# Altium PCB DVT-Discrete.PcbDoc
Units mm, origin at the board's own origin, x right, y up, seen from the top; angles counter-clockwise.
Board outline 100 x 78 mm, 2 copper layers (Top Layer, Bottom Layer); 45 components, 38 nets, 166 pads, 3 vias.
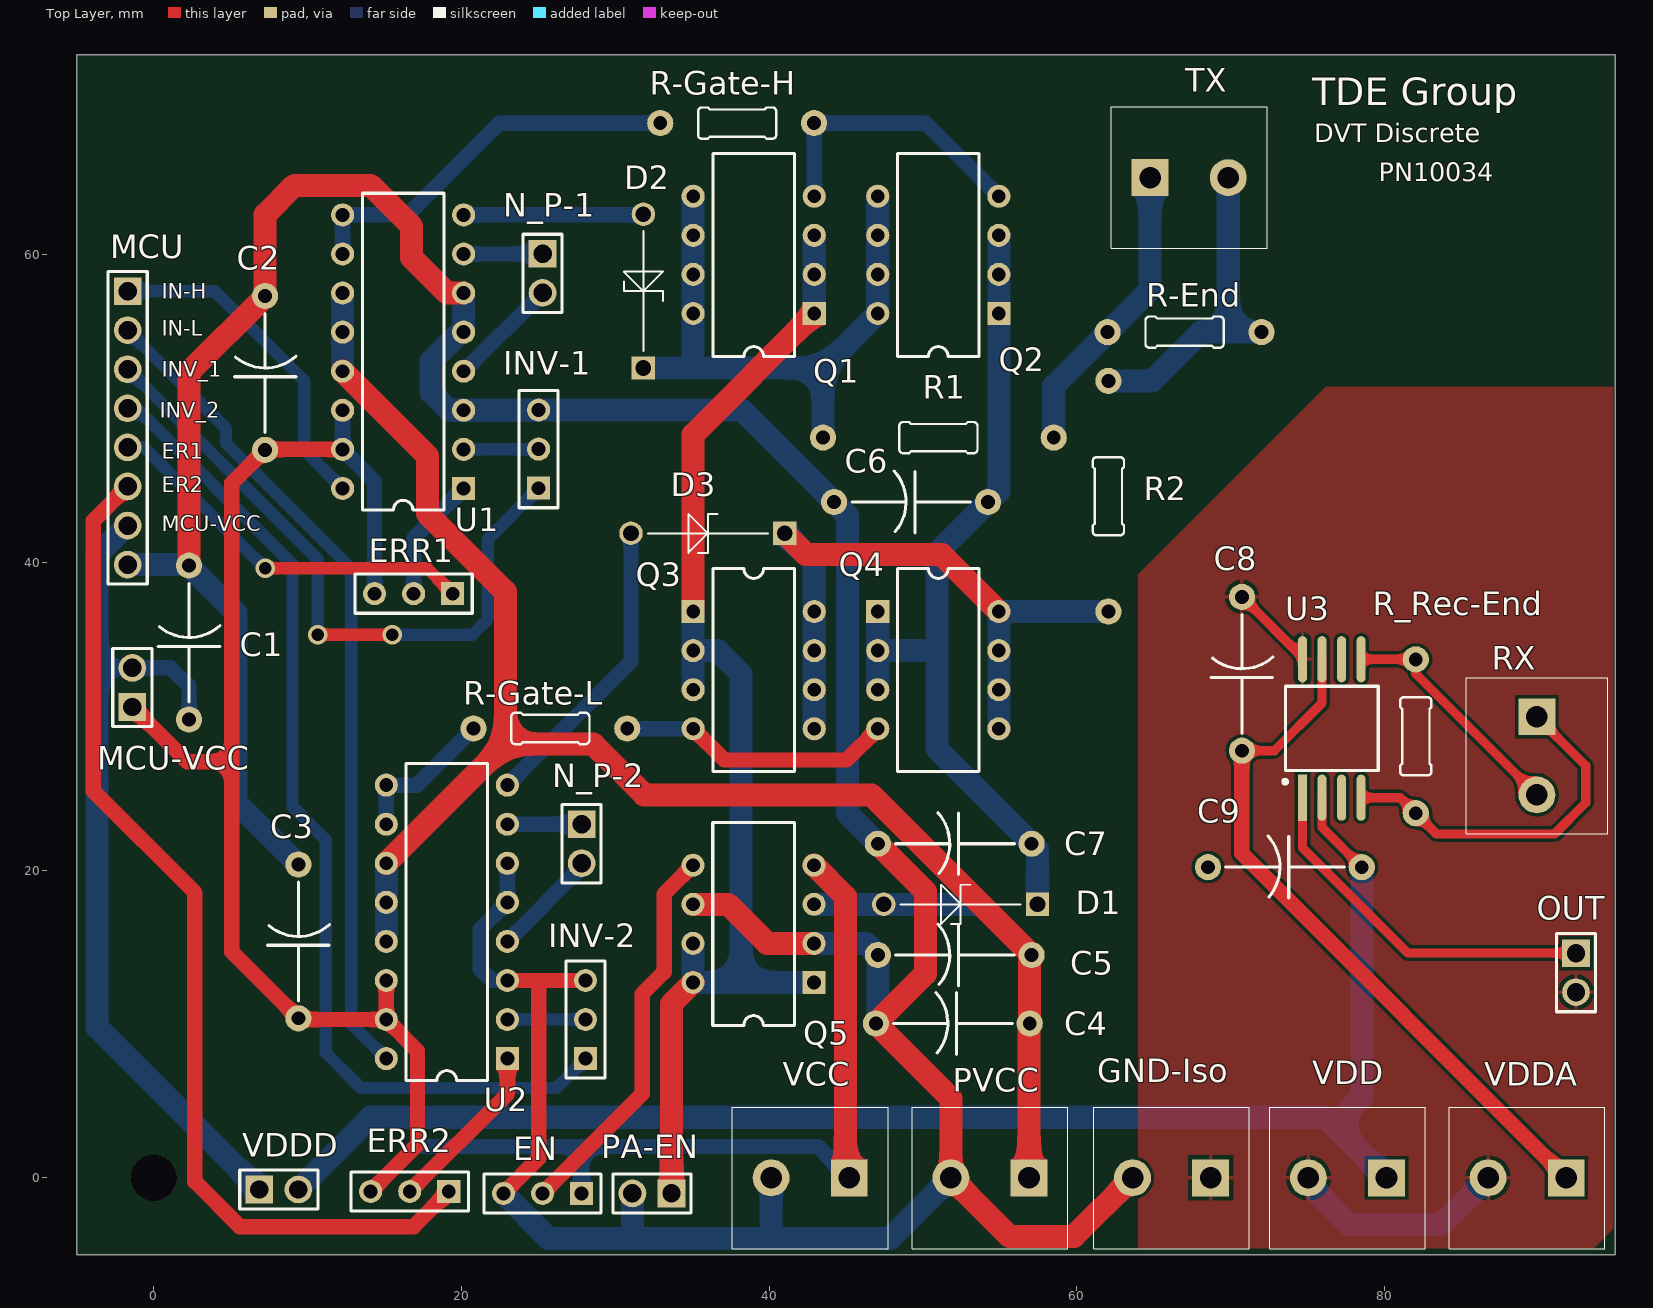
[diagram p0: Top Layer view]
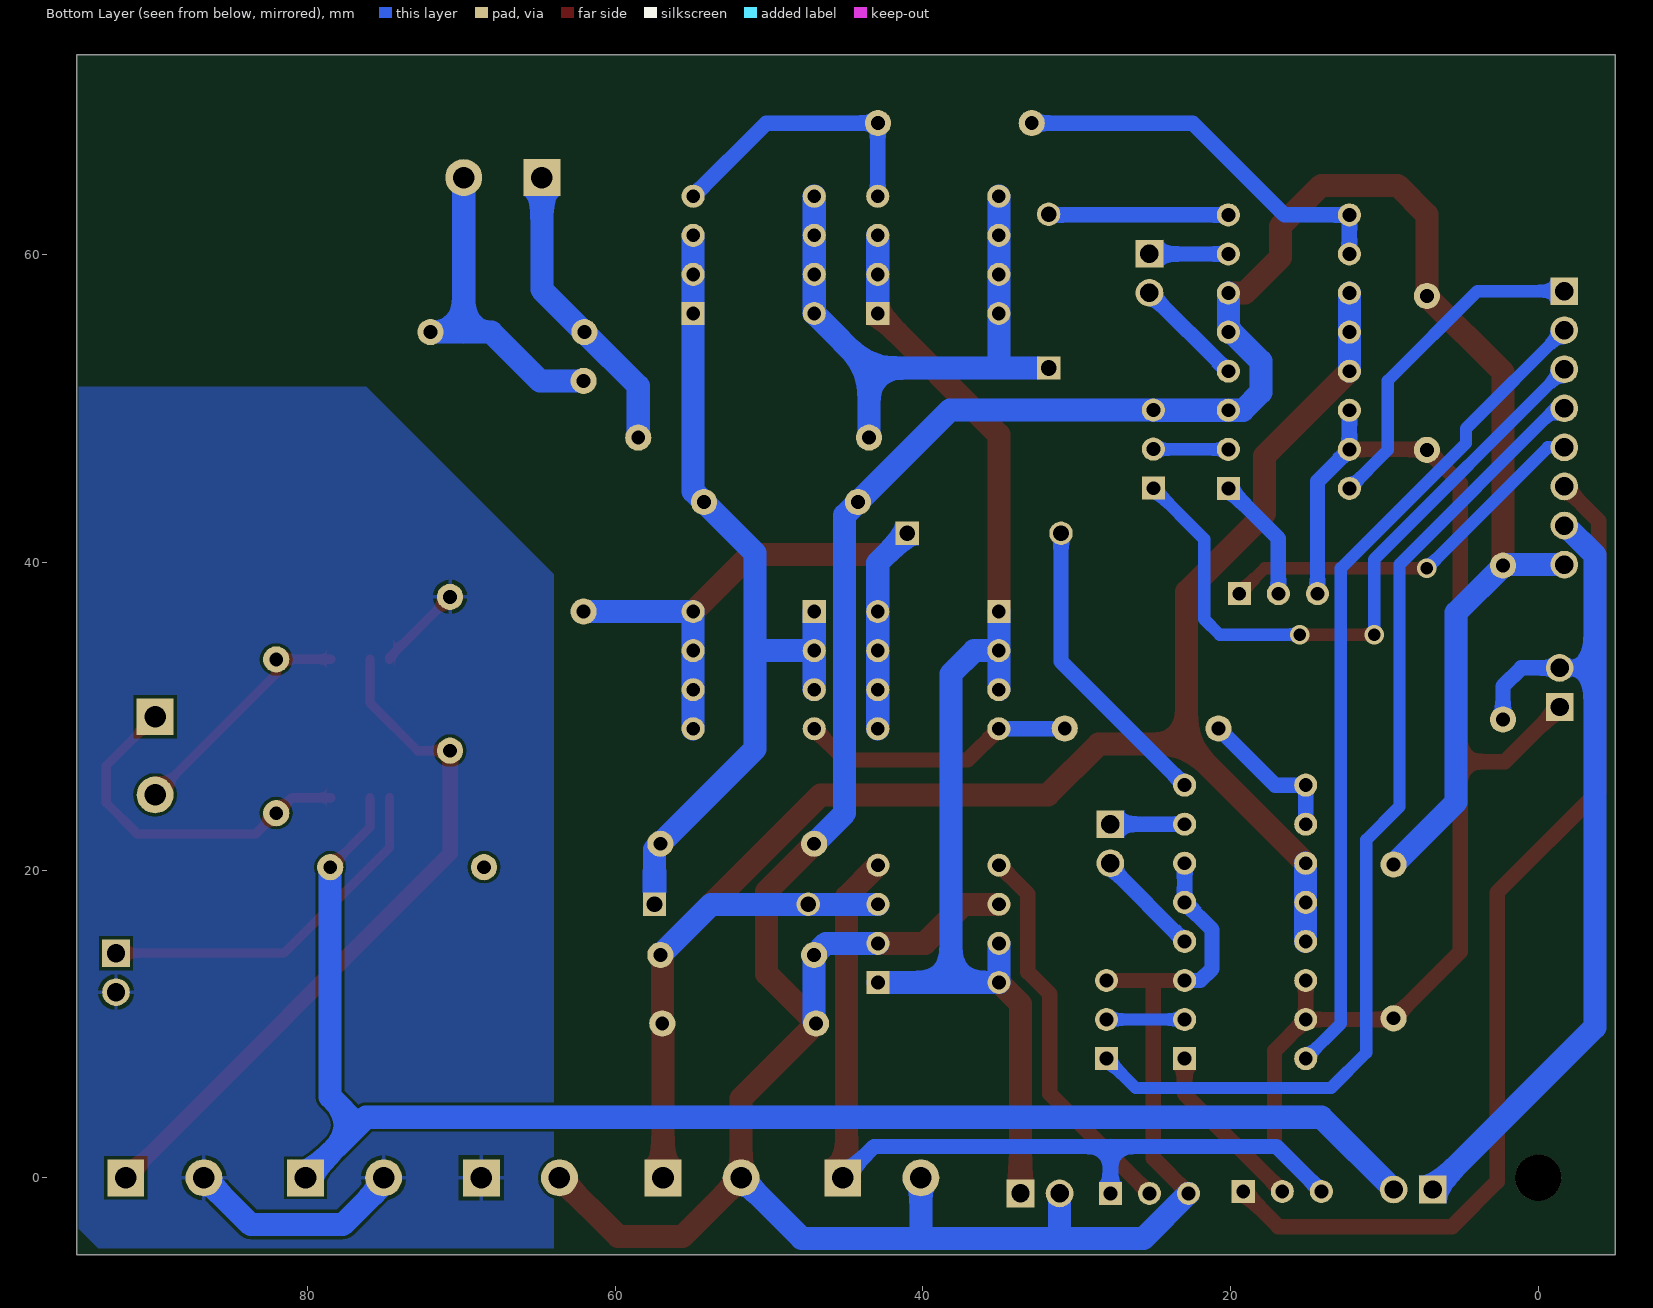
[diagram p1: Bottom Layer view, seen from below]

## Layer stack, top to bottom
Top Solder: solder mask 0.0102, Solder Resist, Dk 3.5
Top Layer: signal copper 0.0356
Dielectric 1: dielectric 0.32, FR-4, Dk 4.8
Bottom Layer: signal copper 0.0356
Bottom Solder: solder mask 0.0102, Solder Resist, Dk 3.5

## Board outline
-5,-5 -5,73 95,73 95,-5

## Design rules (kind name [scope] priority, off if disabled: settings)
Clearance [All] p1: gap=0.2
HoleSize [All] p1: absolutevalues=TRUE maxlimit=5 minlimit=0.025 maxpercent=80.000 minpercent=20.000
PolygonConnect [All] p1: connectstyle=Relief reliefconductorwidth=0.254 reliefentries=4 polygonreliefangle="90 Angle" airgapwidth=0.254
RoomDefinition DVT-Discrete-2 [InComponentClass('DVT-Discrete-2')] p1: confinementstyle=ConfineIn formatcopy=TRUE lockcomponents=FALSE outline -9.064,-13.096 102.108,-13.096 102.108,80.503 -9.064,80.503
RoomDefinition DVT-Discrete-1 [InComponentClass('DVT-Discrete-1')] p2: confinementstyle=ConfineIn formatcopy=TRUE lockcomponents=FALSE outline -7.286,-17.399 105.156,-17.399 105.156,78.867 -7.286,78.867
RoutingVias [All] p1: holewidth=0.711 width=1.27 viastyle="Through Hole" minholewidth=0.711 minwidth=1.27 maxholewidth=0.711 maxwidth=1.27
SilkToSolderMaskClearance [IsPad] p1: minsilkscreentomaskgap=0.1 clearancetoexposedcopper=TRUE
SolderMaskExpansion [All] p1: expansion=0.102
Width [All] p1: maxlimit=5 minlimit=0.254 preferedwidth=0.8
28 further rules are at their usual default settings.

## Classes and differential pairs
component class DVT-Discrete-1: C6 C7 D1 D2 D3 EN ERR1 ERR2 INV-1 INV-2 MCU N_P-1 N_P-2 PA-EN Q1 Q2 Q3 Q4 Q5 R1 R2 R-End R-Gate-H R-Gate-L TX U1 U2
component class DVT-Discrete-2: C1 C2 C3 C4 C5 C8 C9 GND-Iso MCU-VCC OUT PVCC R_Rec-End RX U3 VCC VDD VDDA VDDD

## Components (designator, comment, footprint, x,y, rotation, side; value= is the part's Value field where it differs from the comment)
C1 "Capacitor-Dummy-THT" Dummy-10mm 2.286,34.798 r90 top
C2 "Capacitor-Dummy-THT" Dummy-10mm 7.239,52.324 r90 top
C3 "Capacitor-Dummy-THT" Dummy-10mm 9.398,15.367 r90 top
C4 "Capacitor-Dummy-THT" Dummy-10mm 51.943,10.033 r180 top
C5 "Capacitor-Dummy-THT" Dummy-10mm 52.07,14.478 r180 top
C6 "Capacitor-Dummy-THT" Dummy-10mm 49.229,43.927 r180 top
C7 "Capacitor-Dummy-THT" Dummy-10mm 52.07,21.717 r180 top
C8 "Capacitor-Dummy-THT" Dummy-10mm 70.739,32.766 r90 top
C9 "Capacitor-Dummy-THT" Dummy-10mm 73.533,20.193 r180 top
D1 "Diode-Dummy" DO-15-Dummy 52.451,17.78 r0 top
D2 "Diode-Dummy" DO-15-Dummy 31.83,57.643 r270 top
D3 "Diode-Dummy" DO-15-Dummy 36.021,41.895 r0 top
EN "Plug_3_90_2.54" HDR1X3 25.273,-1.016 r180 top
ERR1 "Plug_3_90_2.54" HDR1X3 16.891,37.973 r180 top
ERR2 "Plug_3_90_2.54" HDR1X3 16.637,-0.889 r180 top
GND-Iso "PHOENIX_1715721" Phoenix-2-5_08 66.167,0 r180 top
INV-1 "Plug_3_90_2.54" HDR1X3 25.019,47.371 r90 top
INV-2 "Plug_3_90_2.54" HDR1X3 28.067,10.287 r90 top
MCU "Plug_08_2.54" HDR1X8_2.54 -1.698,48.753 r270 top
MCU-VCC "Plug_2_90_2.54" HDR1X2 -1.397,31.877 r90 top
N_P-1 "Plug_2_90_2.54" HDR1X2 25.273,58.801 r270 top
N_P-2 "Plug_2_90_2.54" HDR1X2 27.813,21.717 r270 top
OUT "Plug_2_90_2.54" HDR1X2 92.456,13.335 r270 top
PA-EN "Plug_2_90_2.54" HDR1X2 32.385,-1.016 r180 top
PVCC "PHOENIX_1715721" Phoenix-2-5_08 54.356,0 r180 top
Q1 "XTR2N0825-D" DIP-8-Ceramic-HT#1 39,60 r90 top
Q2 "XTR2N0525-D" DIP-8-Ceramic-HT#1 51,60 r90 top
Q3 "XTR2N0825-D" DIP-8-Ceramic-HT#1 39,33 r270 top
Q4 "XTR2N0525-D" DIP-8-Ceramic-HT#1 51,33 r270 top
Q5 "XTR20411A-D" DIP-8-Ceramic-HT#2 38.989,16.51 r90 top
R1 "Resistor-Dummy-THT" Dummy-15mm 51.007,48.118 r0 top
R2 "Resistor-Dummy-THT" Dummy-15mm 62.056,44.308 r90 top
R-End "Resistor-Dummy-THT" Dummy-10mm 67.009,54.976 r180 top
R-Gate-H "Resistor-Dummy-THT" Dummy-10mm 37.926,68.565 r180 top
R-Gate-L "Resistor-Dummy-THT" Dummy-10mm 25.781,29.21 r180 top
R_Rec-End "Resistor-Dummy-THT" Dummy-10mm 82.042,28.702 r270 top
RX "PHOENIX_1715721" Phoenix-2-5_08 89.916,27.432 r270 top
TX "PHOENIX_1715721" Phoenix-2-5_08 67.31,65.024 r0 top
U1 "XTR25411A-D" DIP-16-Ceramic-HT 16.209,53.706 r90 top
U2 "XTR25411A-D" DIP-16-Ceramic-HT 19.05,16.637 r90 top
U3 "HMXCMP01DEN" Honeywell-SO8 76.581,29.21 r0 top
VCC "PHOENIX_1715721" Phoenix-2-5_08 42.672,0 r180 top
VDD "PHOENIX_1715721" Phoenix-2-5_08 77.597,0 r180 top
VDDA "PHOENIX_1715721" Phoenix-2-5_08 89.281,0 r180 top
VDDD "Plug_2_90_2.54" HDR1X2 8.128,-0.762 r0 top

## Footprints (in the part's own frame and the unit in brackets; to place one, negate y for a bottom-side part, rotate by r counter-clockwise, add the part's x,y. Pads: shape width x height; smd on the part's side, far side on the other; paste and mask are expansions set on the pad)
DIP-8-Ceramic-HT#1 [mm] "DIP; 8 Leads; Row Spacing 7.62 mm; Pitch 2.54 mm"
  rect 1.5x1.5 hole 0.9: 1(-3.81,-3.935)
  round 1.5 hole 0.9: 1(-1.27,-3.935) 1(1.27,-3.935) 4(3.81,-3.935) 5(-3.81,3.935) 5(-1.27,3.935) 5(1.27,3.935) 5(3.81,3.935)
  silkscreen extent -6.6,-2.65 6.6,2.65, body extent -6.6,-2.65 6.6,2.65, height 3
DIP-8-Ceramic-HT#2 [mm] "DIP; 8 Leads; Row Spacing 7.62 mm; Pitch 2.54 mm"
  rect 1.5x1.5 hole 0.9: 1(-3.81,-3.935)
  round 1.5 hole 0.9: 2(-1.27,-3.935) 3(1.27,-3.935) 4(3.81,-3.935) 5(3.81,3.935) 6(1.27,3.935) 7(-1.27,3.935) 8(-3.81,3.935)
  silkscreen extent -6.6,-2.65 6.6,2.65, body extent -6.6,-2.65 6.6,2.65, height 3
DIP-16-Ceramic-HT [mm] "DIP; 16 Leads; Row Spacing 7.62 mm; Pitch 2.54 mm"
  rect 1.5x1.5 hole 0.9: 1(-8.89,-3.935)
  round 1.5 hole 0.9: 2(-6.35,-3.935) 3(-3.81,-3.935) 4(-1.27,-3.935) 5(1.27,-3.935) 6(3.81,-3.935) 7(6.35,-3.935) 8(8.89,-3.935) 9(8.89,3.935) 10(6.35,3.935) 11(3.81,3.935) 12(1.27,3.935) 13(-1.27,3.935) 14(-3.81,3.935) 15(-6.35,3.935) 16(-8.89,3.935)
  silkscreen extent -10.3,-2.65 10.3,2.65, body extent -10.3,-2.65 10.3,2.65, height 3
DO-15-Dummy [mil] "DO-15-Dummy"
  rect 60x60 hole 40: 1(196.85,0)
  round 60 hole 40: 2(-196.85,0)
  silkscreen extent -154,-50 154,50, body extent -152,-59 146,59, height 138
Dummy-10mm [mm] "Dummy-10mm"
  round 1.7 hole 0.9: 1(-5,0) 2(5,0)
  silkscreen extent -3.88,-2.01 3.85,2, body extent -2.39,-0.88 2.41,0.88, height 1.87
Dummy-15mm [mm] "Dummy-15mm"
  round 1.7 hole 0.9: 1(-7.5,0) 2(7.5,0)
  silkscreen extent -2.54,-1.02 2.54,1.02, body extent -2.39,-0.88 2.41,0.88, height 1.87
HDR1X2 [mm] "Connector; Header; 2 Position"
  rect 1.8x1.8 hole 1.2: 1(-1.27,0)
  round 1.8 hole 1.2: 2(1.27,0)
  silkscreen extent -2.54,-1.27 2.54,1.27, body extent -2.54,-1.27 2.54,1.27, height 8.62
HDR1X3 [mm] "Connector; Header; 3 Position"
  rect 1.5x1.5 hole 0.9: 1(-2.54,0)
  round 1.5 hole 0.9: 2(0,0) 3(2.54,0)
  silkscreen extent -3.81,-1.27 3.81,1.27, body extent -3.81,-1.27 3.81,1.27, height 8.62
HDR1X8_2.54 [mm] "Connector; Header; 8 Position"
  rect 1.8x1.8 hole 1.2: 1(-8.89,0)
  round 1.8 hole 1.2: 2(-6.35,0) 3(-3.81,0) 4(-1.27,0) 5(1.27,0) 6(3.81,0) 7(6.35,0) 8(8.89,0)
  silkscreen extent -10.16,-1.27 10.16,1.27, body extent -10.18,-1.19 10.14,1.35, height 7.27
Honeywell-SO8 [mm] "Honeywell-SO8"
  rect 0.6x3 smd: 1(-1.905,-4.5)
  oval 0.6x3 smd: 2(-0.635,-4.5) 3(0.635,-4.5) 4(1.905,-4.5) 5(1.905,4.5) 6(0.635,4.5) 7(-0.635,4.5) 8(-1.905,4.5)
  silkscreen extent -3.16,-3.58 3.02,2.75, body extent -3.04,-3.2 3,3.21, height 3
Phoenix-2-5_08 [mm] "Phoenix, 1715721"
  rect 2.4x2.4 hole 1.4: 1(-2.54,0)
  round 2.4 hole 1.4: 2(2.54,0)
  silkscreen extent -5.06,-4.6 5.06,4.6, body extent -5.05,-5.19 5.85,4.61, height 14.2

## Part data
EN ERR1 ERR2 INV-1 INV-2: "Plug,-3-Pin"
GND-Iso PVCC RX TX VCC VDD VDDA: library part 2Pol_1715721, "Phoenix, 2 pol, 5.08mm, 22A, 715721"
MCU: "Plug, 08-Pin"
MCU-VCC N_P-1 N_P-2 OUT PA-EN VDDD: "Plug, 2-Pin"
Q1 Q3: "N-FET, 80V@ 4A"
Q2 Q4: "P-FET, 50V@ 4A"
Q5 U1 U2: "Gate driver"
U3: "HiTemp Comparator"

## Free pads (board coordinates)
  round 3 hole 3 unplated: NDK(0,0)

## Via types
v1: diameter 1.27, hole 0.8, Top Layer to Bottom Layer, 3 vias

## Nets (pads, with @x,y where several pads share a name; then routed paths per layer and width w, separated by ;. In a path a pad name is that pad's centre, name@x,y a point inside that pad or via, vN(x,y) a via of type N, cw(c..) or ccw(c..) an arc to the next point about the centre after c; other vN are vias at no path point)
5V: C8.1 U3.7 VDDA.1 | length 45.8
  Top Layer w0.6: C8.1 72.851,27.766 75.946,30.861 U3.7
  Top Layer w1: C8.1 70.739,21.082 VDDA.1
GND: C1.2 C2.2 C3.2 C4.2 C5.2 C6.2 C7.2 EN.3 GND-Iso.2 INV-1.3 INV-2.3 MCU.8 PA-EN.2 PVCC.2 Q5.2 Q5.6 U1.3 U1.5 U1.6 U2.3 U2.5 U2.6 VCC.2 | length 256.4
  Top Layer w1: U1.5@19.924,54.976 U1.5 ; EN.3 25.019,1.27 25.019,12.827 ; U2.3 INV-2.3 ; INV-1.3@25.004,49.896 INV-1.3
  Top Layer w1.5: C1.2 2.286,52.371 C2.2 7.239,62.611 9.144,64.516 14.097,64.516 16.764,61.849 16.764,59.817 19.065,57.516 U1.6 ; Q5.6 37.338,17.78 39.878,15.24 Q5.2 ; C7.2 50.165,18.622 50.165,13.255 C4.2 51.816,5.16 PVCC.2 55.626,-3.81 59.817,-3.81 GND-Iso.2
  Bottom Layer w1: U2.3 21.971,12.827 21.209,13.589 21.209,16.131 U2.5 U2.6
  Bottom Layer w1.5: MCU.8 C1.2@2.221,39.863 ; C1.2 5.334,36.75 5.334,24.431 C3.2 ; U1.5@19.924,54.976 18.034,53.086 18.034,51.054 19.192,49.896 U1.3 INV-1.3@25.004,49.896 ; U1.5 U1.6 ; EN.3 25.654,-3.937 31.242,-3.937 ; INV-1.3 38.245,49.911 C6.2 45.085,43.071 45.085,23.702 C7.2 ; PA-EN.2 31.115,-3.81 31.242,-3.937 ; VCC.2 40.132,-3.937 ; Q5.2 46.308,15.24 C5.2 C4.2@47.07,10.16 ; PVCC.2 47.879,-3.937 40.132,-3.937 ; 31.242,-3.937 40.132,-3.937
GND-R: C8.2 GND-Iso.1 OUT.2 U3.8 VDD.2 VDDA.2 | length 20.1
  Top Layer w0.6: C8.2 74.676,33.829 U3.8
  Bottom Layer w1.5: VDD.2 75.057,-0.381 77.724,-3.048 83.693,-3.048 VDDA.2
GNDR: C9.2
NetC1_1: C1.1 MCU-VCC.2 MCU.7 VDDD.1 | length 56.8
  Bottom Layer w1: -3.683,33.147 MCU-VCC.2 1.096,33.147 2.286,31.957 C1.1@2.286,30.052
  Bottom Layer w1.5: MCU.7 -1.774,42.403 -3.683,40.494 -3.683,33.147 -3.683,9.779 VDDD.1
NetC6_1: C6.1 C7.1 D1.1 Q2.1 Q4.1 | length 56.9
  Bottom Layer w1.5: Q4.1@47.065,31.73 Q4.1@47.065,34.27 ; Q4.1@47.065,36.81 Q4.1@47.065,34.27 ; Q2.1@54.935,61.27 54.935,58.73 54.935,56.19 54.935,44.633 C6.1 50.927,40.625 50.927,34.246 ; C7.1 57.451,21.336 D1.1 ; C7.1@57.137,21.657 50.927,27.868 50.927,34.246 ; Q4.1@47.065,34.27 50.903,34.27 50.927,34.246
NetC9_1: C9.1 U3.2 VDD.1 VDDD.2 | length 97.4
  Top Layer w0.6: U3.2 75.946,22.78 C9.1
  Bottom Layer w1.5: VDDD.2 14.097,3.937 76.2,3.937 VDD.1 ; 76.708,3.429 78.533,5.254 C9.1
NetD2_1: D2.1 Q1.5 Q2.5 R1.1 | length 39.1
  Bottom Layer w1.5: 32.592,52.643 43.518,52.643 ; 35.065,52.83 35.065,56.19 35.065,58.73 35.065,61.27 Q1.5@35.065,63.81 ; R1.1@43.518,48.129 43.518,52.643 ; Q2.5@47.065,63.81 47.065,61.27 47.065,58.73 47.065,56.19 43.518,52.643
NetD2_2: D2.2 U1.8 | length 11.7
  Bottom Layer w1: U1.8 31.783,62.596 D2.2
NetD3_1: D3.1 Q3.5 Q4.5 R2.1 | length 44.3
  Top Layer w1.5: D3.1 42.403,40.513 51.232,40.513 Q4.5@54.935,36.81
  Bottom Layer w1: R2.1@62.054,36.81 R2.1
  Bottom Layer w1.5: D3.1 42.935,39.981 42.935,36.81 42.935,34.27 42.935,31.73 Q3.5@42.935,29.19 ; Q4.5@54.935,29.19 54.935,31.73 54.935,34.27 54.935,36.81 R2.1@62.054,36.81
NetD3_2: D3.2 U2.8 | length 19.7
  Bottom Layer w1: U2.8 31.021,33.563 D3.2
NetEN_2: EN.2 Q5.5 | length 25.4
  Top Layer w1: EN.2 31.75,5.461 31.75,11.938 33.18,13.368 33.18,18.446 Q5.5
NetERR1_1: ERR1.1 MCU.5 | length 25.1
  Top Layer w0.8: v1(7.239,39.624) 17.78,39.624 ERR1.1
  Bottom Layer w0.8: MCU.5 -0.62,47.483 v1(7.239,39.624)
NetERR1_2: ERR1.2 U1.1 | length 8.2
  Bottom Layer w1: ERR1.2 16.891,41.563 U1.1
NetERR2_1: ERR2.1 MCU.6 | length 67.5
  Top Layer w1: MCU.6 -3.937,42.704 -3.937,25.146 2.667,18.542 2.667,-0.254 5.588,-3.175 16.891,-3.175 ERR2.1
NetERR2_2: ERR2.2 U2.1 | length 11.3
  Top Layer w1: ERR2.2 22.985,5.459 U2.1
NetINV-1_1: INV-1.1 MCU.3 | length 43.7
  Top Layer w0.8: v1(10.668,35.306) v1(15.494,35.306)
  Bottom Layer w0.8: MCU.3 10.668,40.197 v1(10.668,35.306) ; v1(15.494,35.306) 20.701,35.306 21.717,36.322 21.717,41.529 INV-1.1
NetINV-1_2: INV-1.2 U1.2 | length 4.9
  Bottom Layer w0.8: U1.2 INV-1.2@25.004,47.356
NetINV-2_1: INV-2.1 MCU.4 | length 66.2
  Bottom Layer w0.8: MCU.4 -1.128,50.023 9.017,39.878 9.017,24.13 11.176,21.971 11.176,8.128 13.462,5.842 26.162,5.842 INV-2.1
NetINV-2_2: INV-2.2 U2.2 | length 5.1
  Bottom Layer w0.8: U2.2 INV-2.2
NetMCU_1: MCU.1 U1.16 | length 21.9
  Bottom Layer w0.8: MCU.1 3.952,57.643 9.779,51.816 9.779,47.311 U1.16
NetMCU_2: MCU.2 U2.16 | length 54.3
  Bottom Layer w0.8: MCU.2 4.699,48.706 4.699,47.752 12.827,39.624 12.827,10.035 U2.16
NetN_P-1_1: N_P-1.1 U1.7 | length 5.1
  Bottom Layer w1: U1.7 25.258,60.056 N_P-1.1
NetN_P-1_2: N_P-1.2 U1.4 | length 7.2
  Bottom Layer w1: U1.4 20.178,52.436 N_P-1.2
NetN_P-2_1: N_P-2.1 U2.7 | length 4.8
  Bottom Layer w1: U2.7 N_P-2.1
NetN_P-2_2: N_P-2.2 U2.4 | length 7.1
  Bottom Layer w1: U2.4 27.813,20.195 N_P-2.2
NetOUT_1: OUT.1 U3.1 | length 23.9
  Top Layer w0.6: U3.1 74.676,21.463 81.534,14.605 OUT.1
NetPA-EN_1: PA-EN.1 Q1.1 Q3.1 Q5.1 Q5.7 Q5.8 | length 81.3
  Top Layer w1.5: PA-EN.1 33.655,11.301 Q5.8 ; Q3.1@35.065,36.81 35.065,48.32 Q1.1@42.935,56.19
  Bottom Layer w1.5: Q5.7 Q5.8 Q5.1 ; Q3.1@35.065,31.73 Q3.1@35.065,34.27 ; Q3.1@35.065,36.81 Q3.1@35.065,34.27 ; 38.18,12.7 38.18,32.751 36.661,34.27 Q3.1@35.065,34.27 ; Q1.1@42.935,56.19 42.935,58.73 Q1.1@42.935,61.27
NetQ1_4: Q1.4 Q2.4 R-Gate-H.1 | length 18.7
  Bottom Layer w1: R-Gate-H.1 50.18,68.565 Q2.4 ; Q1.4 R-Gate-H.1@42.935,68.556
NetQ3_4: Q3.4 Q4.4 R-Gate-L.1 | length 18
  Top Layer w1: Q3.4 37.092,27.163 45.038,27.163 Q4.4
  Bottom Layer w1: R-Gate-L.1@30.781,29.195 35.06,29.195 Q3.4
NetR1_2: R1.2 R-End.2 TX.1 | length 19.5
  Bottom Layer w1.5: R1.2 58.507,51.474 R-End.2 64.77,57.737 TX.1
NetR2_2: R2.2 R-End.1 TX.2 | length 21.3
  Bottom Layer w1.5: R2.2 64.762,51.808 64.77,51.816 64.897,51.816 68.057,54.976 R-End.1 ; 69.85,54.976 TX.2
NetR-Gate-H_2: R-Gate-H.2 U1.9 U1.10 | length 25.7
  Bottom Layer w1: U1.10 U1.9 16.495,62.596 22.464,68.565 R-Gate-H.2
NetR-Gate-L_2: R-Gate-L.2 U2.9 U2.10 | length 9.7
  Bottom Layer w1: U2.10 U2.9 17.098,25.527 R-Gate-L.2
NetR_Rec-End_1: R_Rec-End.1 RX.2 U3.5 | length 15.6
  Top Layer w0.6: U3.5 82.042,33.71 R_Rec-End.1 82.042,32.766 RX.2
NetR_Rec-End_2: R_Rec-End.2 RX.1 U3.4 | length 23.3
  Top Layer w0.6: U3.4 81.034,24.71 R_Rec-End.2 83.392,22.352 91.059,22.352 93.091,24.384 93.091,26.797 RX.1
PVDD: C4.1 C5.1 D1.2 PVCC.1 Q5.3 U1.11 U1.12 U1.13 U2.11 U2.12 U2.13 | length 119.5
  Top Layer w1.5: U1.13 17.78,46.93 17.78,43.18 22.86,38.1 22.86,28.192 ; U2.11 22.86,28.192 ; PVCC.1 C4.1@56.896,10.033 ; C4.1 C5.1@56.943,14.351 ; C5.1 46.656,24.892 31.877,24.892 28.577,28.192 22.86,28.192
  Bottom Layer w1.5: U1.13 U1.12 U1.11 ; U2.13 U2.12 U2.11 ; Q5.3 D1.2 53.768,17.78 C5.1
VCC: C2.1 C3.1 EN.1 ERR1.3 ERR2.3 MCU-VCC.1 Q5.4 U1.14 U1.15 U2.14 U2.15 VCC.1 | length 143.6
  Top Layer w1: MCU-VCC.1 2.159,27.051 5.08,27.051 ; C3.1 5.08,14.685 5.08,27.051 ; C3.1@10.033,10.367 10.113,10.287 U2.15 ; U1.15 7.271,47.356 C2.1 5.08,45.165 5.08,27.051 ; ERR2.3 17.145,2.159 17.145,8.257 U2.15 ; U2.14 U2.15
  Top Layer w1.5: Q5.4 44.958,18.286 44.958,0.889 45.212,0.635 VCC.1
  Bottom Layer w1: U1.14 U1.15 14.351,45.279 ERR1.3@14.351,38.227 ; ERR2.3 17.018,2.032 27.813,2.032 ; EN.1 27.813,2.032 ; VCC.1 43.18,2.032 27.813,2.032
pads on no net: U3.3 U3.6

## Polygon pours and split planes (outlines as drawn)
GND-R on Top Layer "GND-R-Top" (solid, pour order 0): 94.615,51.435 76.2,51.435 65.405,40.64 64.008,39.243 64.008,-4.572 93.599,-4.572 94.869,-3.302 94.869,51.435
GND-R on Bottom Layer "GND-R-Bot" (solid, pour order 2): 94.869,51.435 76.2,51.435 64.008,39.243 64.008,-4.572 93.599,-4.572 94.869,-3.302

## Silkscreen, mask and mechanical layers (free items; w line width, h text height)
Top Overlay:
  text "TDE Group" at 75.311,69.723 h1.8
  text "DVT Discrete" at 75.438,67.31 h1.2
  text "PN10034" at 79.629,64.77 h1.2
  text "IN-H" at 0.508,57.15 h1
  text "IN-L" at 0.508,54.737 h1
  text "INV_1" at 0.508,52.07 h1
  text "INV_2" at 0.381,49.403 h1
  text "ER1" at 0.508,46.736 h1
  text "ER2" at 0.508,44.577 h1
  text "MCU-VCC" at 0.508,42.037 h1
Fix1:
  lines w0.3: 20.144,54.976 20.144,57.516 ; 20.144,57.277 23.876,61.009 23.876,70.612 ; 23.876,70.612 23.241,69.977 24.511,69.977 23.876,70.612
  lines w0.4: 17.907,52.324 17.907,58.674 ; 30.781,29.21 29.591,30.4 29.591,46.736 39.497,56.642 39.497,60.372 42.935,63.81
  lines w0.5: 15.115,17.907 10.922,22.1 10.922,30.48 ; 42.935,56.19 49.308,49.816 ; 49.276,49.784 49.276,46.99 55.626,40.64 ; 10.922,30.48 11.176,30.48 12.192,29.464 9.906,29.464 10.922,30.48 ; 55.626,40.64 55.626,41.91 54.356,40.64 55.626,40.64
  text "PVDD-5V" at 18.161,70.993 h1.5
  text "PGND" at 55.245,38.481 h1.5
  text "PGND+5V" at 7.493,31.75 h1.5
Fix2:
  lines w0.3: 17.78,57.277 19.431,58.928 ; 17.78,59.309 17.78,59.182 19.177,57.785 ; 18.034,54.864 19.685,53.213 ; 18.161,53.467 19.304,54.61 ; 20.32,13.716 22.098,15.494 ; 20.32,15.875 22.098,14.097 ; 31.877,30.607 34.29,28.194 ; 32.385,27.94 34.798,30.353 ; 32.766,47.117 37.719,42.164 ; 33.274,41.148 33.401,41.148 38.862,46.609 ; 41.783,64.262 44.577,67.056 ; 41.91,67.056 44.069,64.897
  lines w0.5: 18.542,25.908 21.336,23.114 ; 20.066,21.971 20.066,27.305
Outline:
  the board outline again, w0.1

## Dimensions
-5,-5 to 95,-5 on Mechanical 16
95,-5 to 95,73 on Mechanical 16